# Altium PCB DISEÑO CON 3.3 Y 5 spi separado y diodos.PcbDoc
Units mm, origin at the board's own origin, x right, y up, seen from the top; angles counter-clockwise.
Board outline 76.2 x 63.5 mm, 2 copper layers (Top Layer, Bottom Layer); 31 components, 40 nets, 161 pads, 0 vias.
Unrouted connection lines stored in the file: 97.
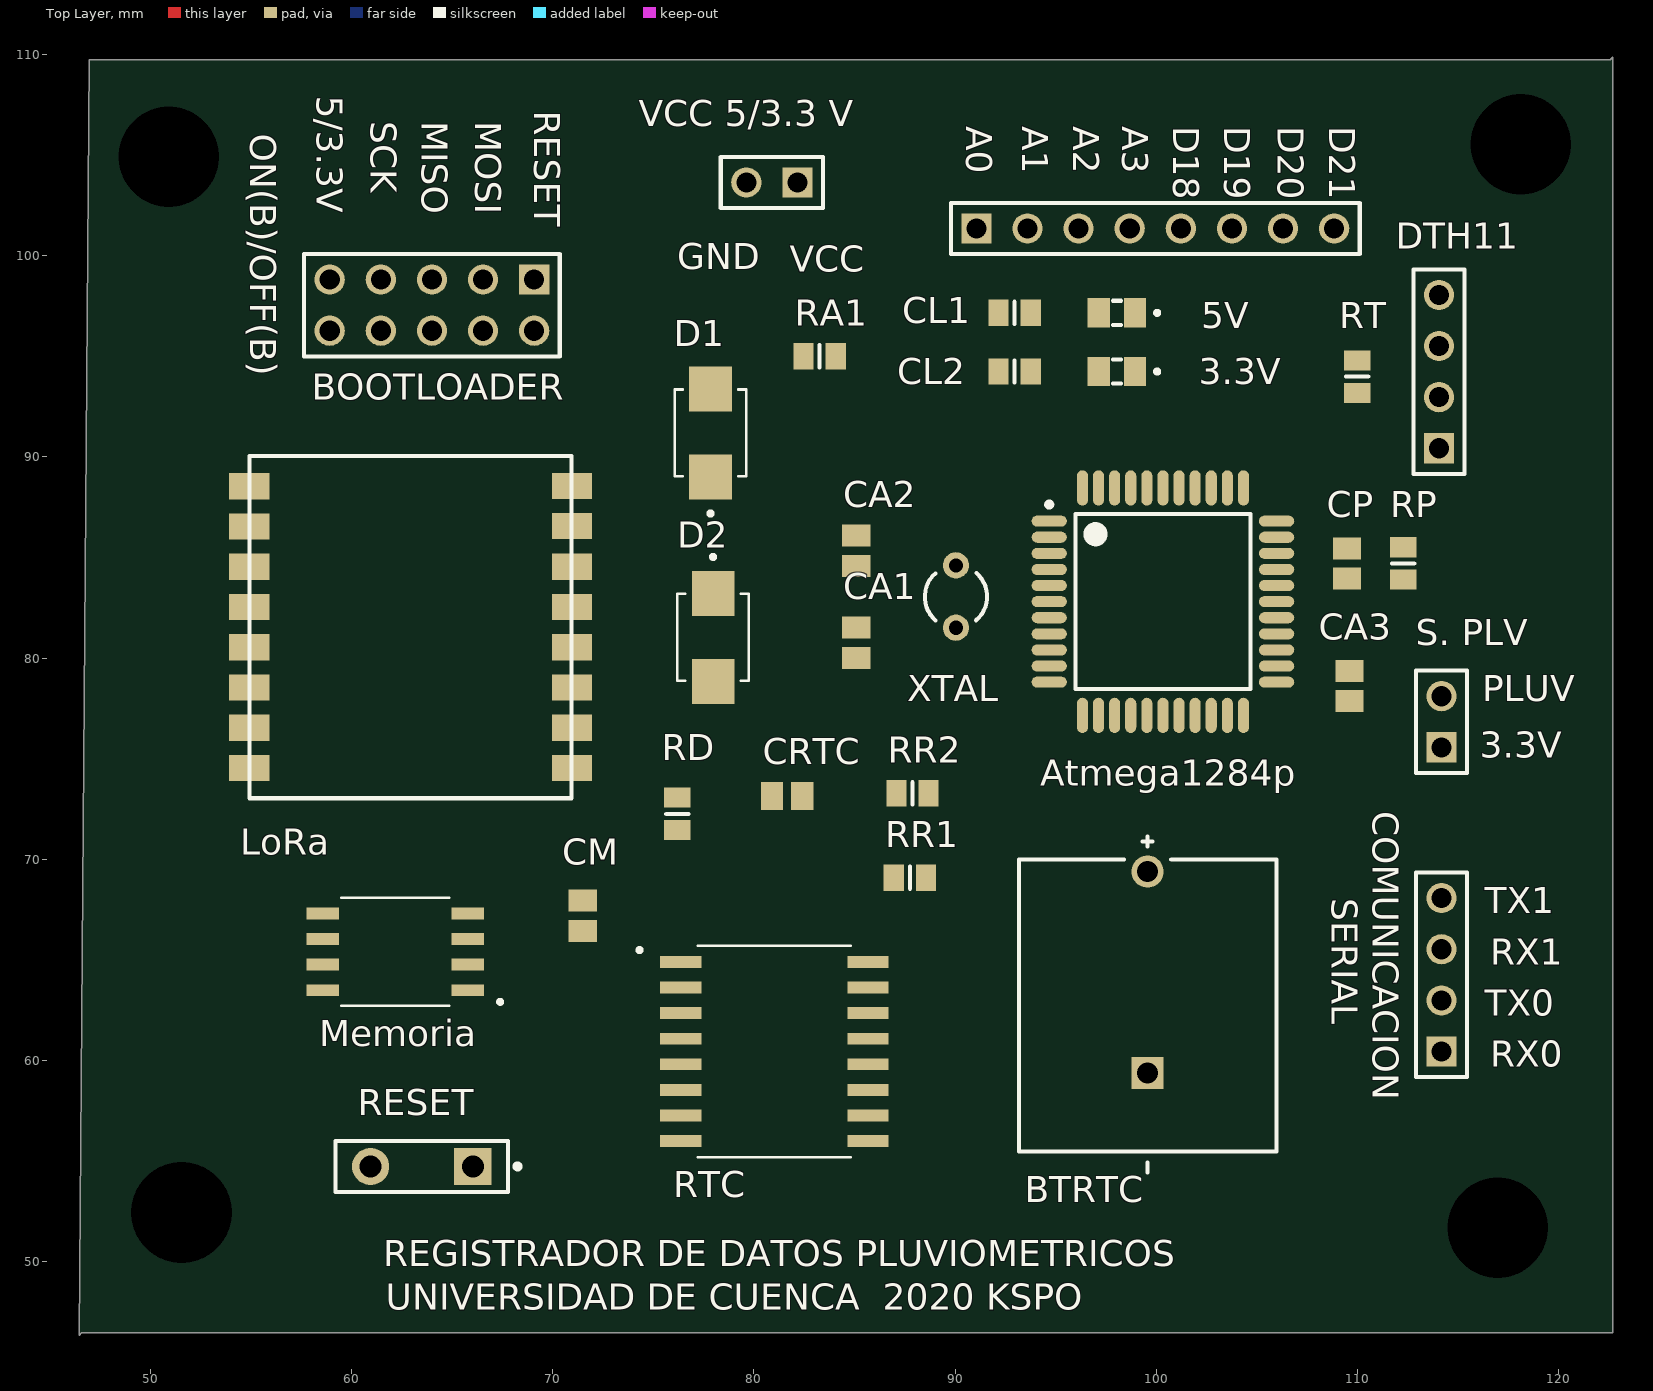
[diagram p0: Top Layer view]
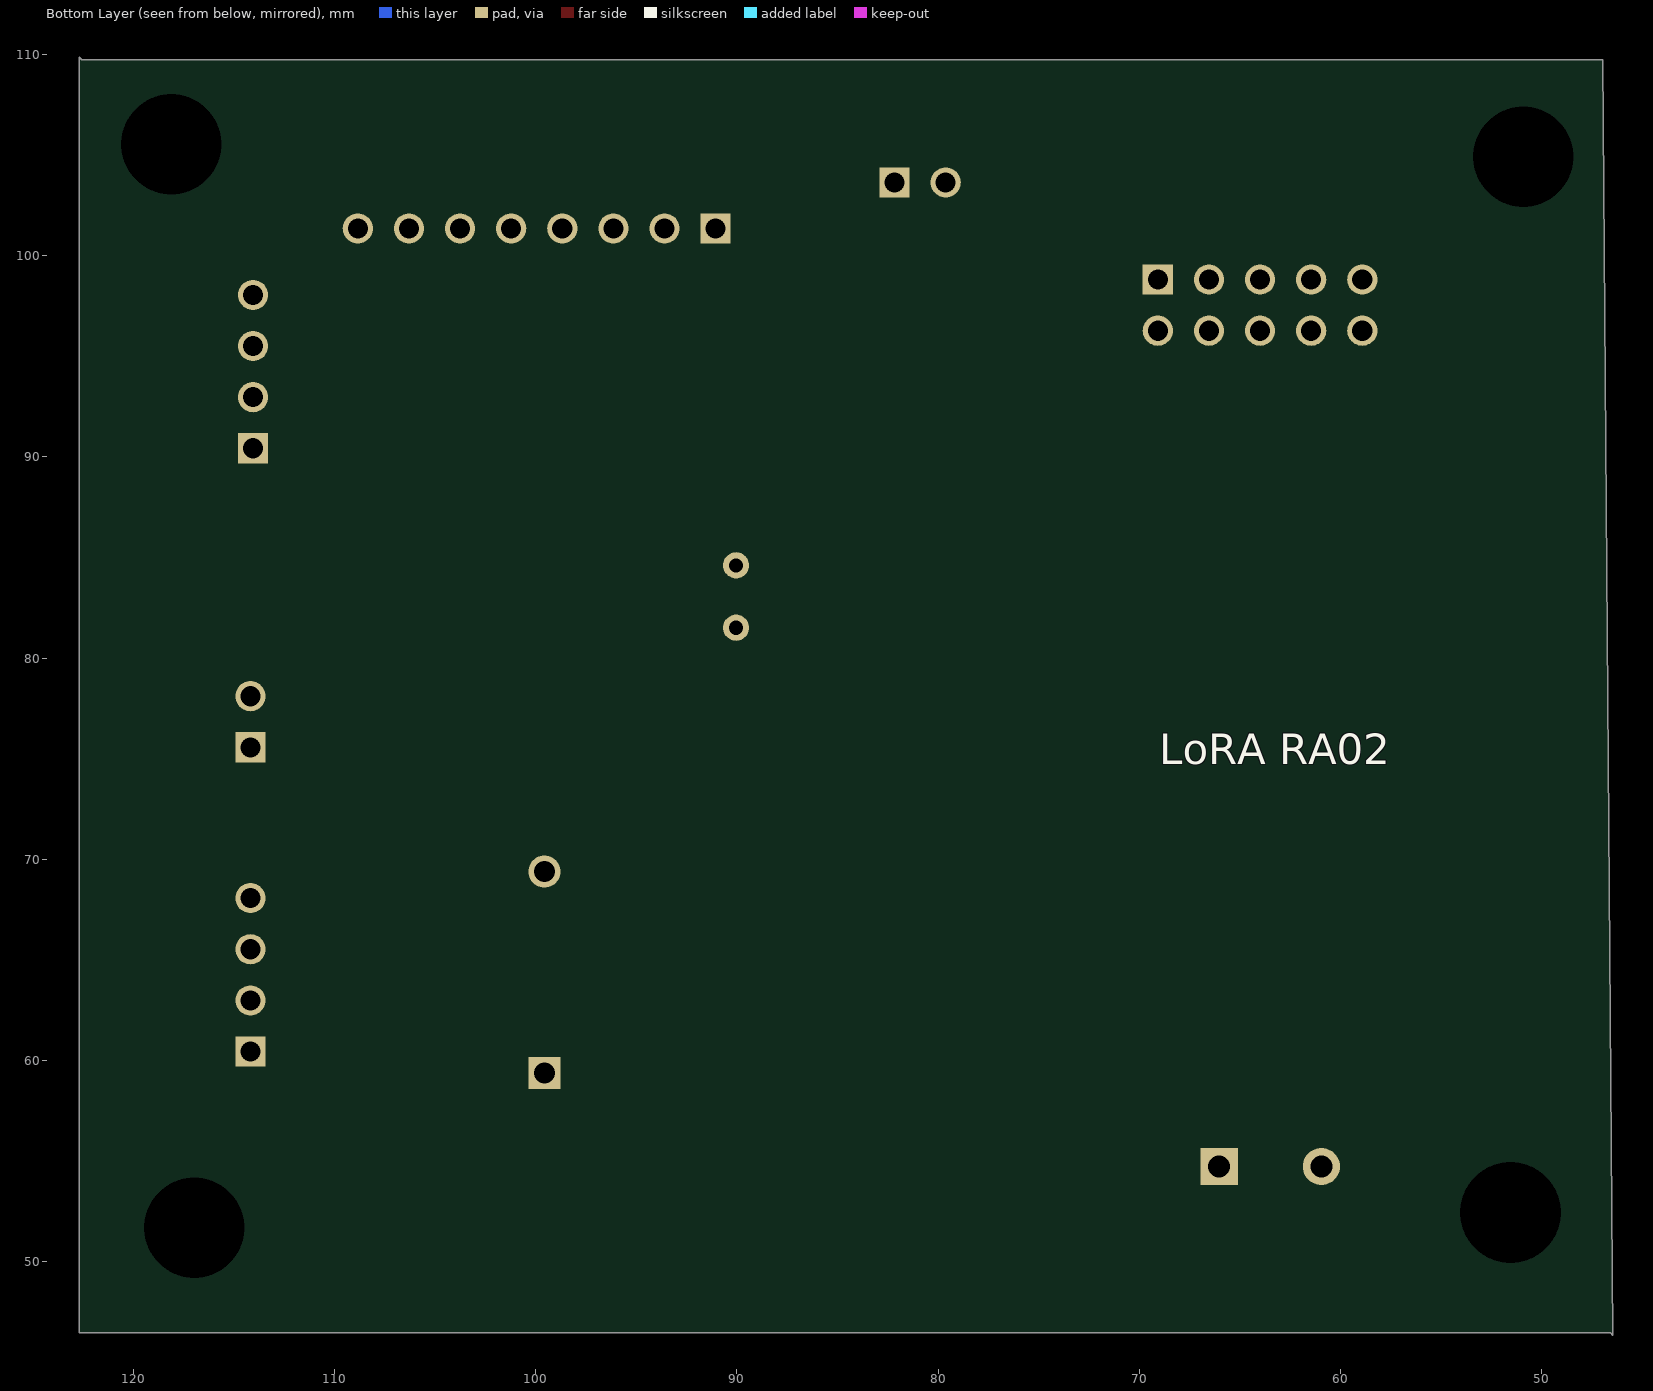
[diagram p1: Bottom Layer view, seen from below]

## Layer stack, top to bottom
Top Solder: solder mask 0.0102, Solder Resist, Dk 3.5
Top Layer: signal copper 0.0356
Dielectric 1: dielectric 0.32, FR-4, Dk 4.8
Bottom Layer: signal copper 0.0356
Bottom Solder: solder mask 0.0102, Solder Resist, Dk 3.5

## Board outline
46.99,109.728 122.555,109.728 122.682,109.855 122.682,46.482 46.609,46.482 46.482,46.355

## Design rules (kind name [scope] priority, off if disabled: settings)
Clearance [All] p1: gap=0.254 ignorepadtopadclearanceinfootprint=FALSE except(0: Arc-Hole Track-Hole SMDPad-Hole THPad-Hole Via-Hole Fill-Hole Poly-Hole Region-Hole Text-Hole)
PolygonConnect [All] p1: connectstyle=Relief reliefconductorwidth=0.254 reliefentries=4 polygonreliefangle="90 Angle" airgapwidth=0.254
RoutingVias [All] p1: holewidth=0.711 width=1.27 viastyle="Through Hole" minholewidth=0.711 minwidth=1.27 maxholewidth=0.711 maxwidth=1.27
SolderMaskExpansion [All] p1: expansion=0.102
Width [All] p1: maxlimit=0.254 minlimit=0.254 preferedwidth=0.254
30 further rules are at their usual default settings.

## Classes and differential pairs
component class "DISEÑO CON 3.3 Y 5 spi separado y diodos": BTRTC CA1 CA2 LORA Memoria RA1 RESET RTC

## Components (designator, comment, footprint, x,y, rotation, side; value= is the part's Value field where it differs from the comment)
1K "RLED5V" 6-0805_L 92.964,97.155 r0 top value=1K
Atmega1284p "ATmega1284-AUR" 44A_N 100.33,82.804 r0 top (schematic designator U1)
BOOTLOADER "Header 5X2" HDR2X5 69.088,98.806 r180 top (schematic designator "S/N BOOTLOADER")
BTRTC "CR-1220-HFN" Panasonic_CR-1220-HFN_MFG 99.568,62.738 r90 top
CA1 "Cap Semi" C0805 85.09,80.76 r270 top value=22pF
CA2 "Cap Semi" C0805 85.09,85.332 r90 top value=22pF
CA3 "Cap Semi" C0805 109.601,78.613 r270 top value=0.1uF (schematic designator CAtmega)
CM "Cap Semi" C0805 71.501,67.195 r270 top value=0.1uF (schematic designator CAM)
COMUNICACION "Header 4" HDR1X4 114.173,60.452 r90 top (schematic designator "COMUNICACION SERIAL")
CP "Cap Semi" C0805 109.474,84.697 r90 top value=0.1uF (schematic designator CPL)
CRTC "Cap Semi" C0805 81.661,73.152 r180 top value=0.1uF (schematic designator CRTC1)
D1 "Diode_Skty" *DIOM5436X247N 77.851,91.186 r90 top (schematic designator DSS24)
D2 "Diode_Skty" *DIOM5436X247N 77.978,81.026 r270 top (schematic designator DSSMe)
DTH11 "" HDR1X4 114.046,90.424 r90 top (schematic designator DTH)
LED3.3V "" *LEDC2012X70N_598-8140-107F(Primary) 98.044,94.234 r180 top
LED5V "" *LEDC2012X70N_598-8140-107F(Primary) 98.044,97.155 r180 top
LoRa "SX1278" SOP200P1800X250-16N 62.865,81.534 r0 top (schematic designator LORA)
Memoria "W25Q128JVSIM_TR" *SOIC127P790X216-8N 62.181,65.405 r180 top (schematic designator MEM)
"PIN A/D" "Header 8" HDR1X8 91.059,101.346 r0 top
PLUV "Header 2" HDR1X2 114.173,75.565 r90 top (schematic designator PLUVIOMETRO)
RA1 "Res3" 6-0805_L 83.274,94.996 r0 top value=10k
RAL3.3 "RLED3.3" 6-0805_L 92.964,94.234 r0 top value=1K
RD "Res3" 6-0805_L 76.2,72.263 r90 top value=10K (schematic designator RPLdio)
RESET "SW-PB" SPST-2 63.5,54.737 r180 top (schematic designator SW1)
RP "Res3" 6-0805_L 112.268,84.709 r90 top value=10K (schematic designator RPL)
RR1 "Res3" 6-0805_L 87.757,69.088 r0 top value=4.7K (schematic designator RTC1)
RR2 "Res3" 6-0805_L 87.884,73.279 r0 top value=4.7K (schematic designator RTC2)
RT "Res3" 6-0805_L 109.982,93.98 r90 top value=10K (schematic designator RDTH)
RTC "DS3231M+" *SOIC127P1032X265-16N 81.026,60.452 r0 top
"VCC 5/3.3 V" "Header 2" HDR1X2 82.169,103.632 r180 top (schematic designator "ALIMENTACION 5/3.3 V")
XTAL "XTAL" R38 90.043,83.058 r0 top (schematic designator YMega)

## Footprints (in the part's own frame and the unit in brackets; to place one, negate y for a bottom-side part, rotate by r counter-clockwise, add the part's x,y. Pads: shape width x height; smd on the part's side, far side on the other; paste and mask are expansions set on the pad)
6-0805_L [mm] "Chip Resistor, Body 2.0x1.2mm, IPC High Density"
  rect 1x1.3 smd: 1(-0.8,0) 2(0.8,0)
  silkscreen extent 0,-0.55 0,0.55, body extent -1.07,-0.7 1.07,0.7, height 0.7
44A_N [mm] "Thin QFP, 44-Leads, Body 10x10mm, Pitch 0.8mm, IPC Medium Density"
  oval 1.75x0.55 smd: 1(-5.65,4) 2(-5.65,3.2) 3(-5.65,2.4) 4(-5.65,1.6) 5(-5.65,0.8) 6(-5.65,0) 7(-5.65,-0.8) 8(-5.65,-1.6) 9(-5.65,-2.4) 10(-5.65,-3.2) 11(-5.65,-4) 23(5.65,-4) 24(5.65,-3.2) 25(5.65,-2.4) 26(5.65,-1.6) 27(5.65,-0.8) 28(5.65,0) 29(5.65,0.8) 30(5.65,1.6) 31(5.65,2.4) 32(5.65,3.2) 33(5.65,4)
  oval 0.55x1.75 smd: 12(-4,-5.65) 13(-3.2,-5.65) 14(-2.4,-5.65) 15(-1.6,-5.65) 16(-0.8,-5.65) 17(0,-5.65) 18(0.8,-5.65) 19(1.6,-5.65) 20(2.4,-5.65) 21(3.2,-5.65) 22(4,-5.65) 34(4,5.65) 35(3.2,5.65) 36(2.4,5.65) 37(1.6,5.65) 38(0.8,5.65) 39(0,5.65) 40(-0.8,5.65) 41(-1.6,5.65) 42(-2.4,5.65) 43(-3.2,5.65) 44(-4,5.65)
  silkscreen extent -5.77,-4.35 4.35,4.95, body extent -5,-5 5,5, height 1.2
*DIOM5436X247N [mm]
  rect 2.25x2.12 smd: A(2.185,0) C(-2.185,0)
  silkscreen extent -4.1,-1.78 2.16,1.78
*LEDC2012X70N_598-8140-107F(Primary) [mm]
  rect 1.1x1.45 smd: A(0.9,0) C(-0.9,0)
  silkscreen extent -2.1,-0.6 0.2,0.6
*SOIC127P790X216-8N [mm]
  rect 1.61x0.58 smd: 1(-3.605,1.905) 2(-3.605,0.635) 3(-3.605,-0.635) 4(-3.605,-1.905) 5(3.605,-1.905) 6(3.605,-0.635) 7(3.605,0.635) 8(3.605,1.905)
  silkscreen extent -5.32,-2.69 2.69,2.69
*SOIC127P1032X265-16N [mm]
  rect 2.05x0.59 smd: 1(-4.655,4.445) 2(-4.655,3.175) 3(-4.655,1.905) 4(-4.655,0.635) 5(-4.655,-0.635) 6(-4.655,-1.905) 7(-4.655,-3.175) 8(-4.655,-4.445) 9(4.655,-4.445) 10(4.655,-3.175) 11(4.655,-1.905) 12(4.655,-0.635) 13(4.655,0.635) 14(4.655,1.905) 15(4.655,3.175) 16(4.655,4.445)
  silkscreen extent -6.8,-5.25 3.8,5.25
C0805 [mm] "Chip Capacitor, Body 2.0x1.3mm, IPC High Density"
  rect 1.1x1.4 smd: 1(-0.75,0) 2(0.75,0)
  body extent -1.1,-0.72 1.1,0.72, height 1.4
HDR1X2 [mm] "Connector; Header; 2 Position"
  rect 1.5x1.5 hole 1: 1(0,0)
  round 1.5 hole 1: 2(2.54,0)
  silkscreen extent -1.27,-1.27 3.81,1.27
HDR1X4 [mm] "Connector; Header; 4 Position"
  rect 1.5x1.5 hole 1: 1(0,0)
  round 1.5 hole 1: 2(2.54,0) 3(5.08,0) 4(7.62,0)
  silkscreen extent -1.27,-1.27 8.89,1.27
HDR1X8 [mm] "Connector; Header; 8 Position"
  rect 1.5x1.5 hole 1: 1(0,0)
  round 1.5 hole 1: 2(2.54,0) 3(5.08,0) 4(7.62,0) 5(10.16,0) 6(12.7,0) 7(15.24,0) 8(17.78,0)
  silkscreen extent -1.27,-1.27 19.05,1.27
HDR2X5 [mm] "Connector; Header; 5x2 Position"
  rect 1.5x1.5 hole 1: 1(0,0)
  round 1.5 hole 1: 2(0,2.54) 3(2.54,0) 4(2.54,2.54) 5(5.08,0) 6(5.08,2.54) 7(7.62,0) 8(7.62,2.54) 9(10.16,0) 10(10.16,2.54)
  silkscreen extent -1.27,-1.27 11.43,3.81
Panasonic_CR-1220-HFN_MFG [mm]
  rect 1.6x1.6 hole 1.05 paste-1000 mask+0: 1(-3.35,0)
  round 1.6 hole 1.05 paste-1000 mask+0: 2(6.65,0)
  silkscreen extent -8.3,-6.4 8.4,6.4, body extent -7.35,-6.5 7.55,6.5, height 0.25
R38 [mm] "Crystal, Thru-Hole; 2 Leads; Body 3.1 x 8.2 mm (Dia.xH)"
  round 1.3 hole 0.7: 1(0,1.55) 2(0,-1.55)
  silkscreen extent -1.55,-1.19 1.55,1.17
SOP200P1800X250-16N [mm] "SOP, 16-Leads, Body 17,00x16,00mm, Pitch 2,00mm, IPC Medium Density"
  rect 2x1.3 smd: 1(-7.93,7) 2(-7.93,5) 3(-7.93,3) 5(-7.93,-1) 6(-7.93,-3) 7(-7.93,-5) 8(-7.93,-7) 9(8.1,-7) 10(8.1,-5) 11(8.1,-3) 12(8.1,-1) 13(8.1,1) 14(8.1,3) 15(8.1,5.029) 16(8.1,7.01)
  rect 2x1.3 smd mask+0.102: 4(-7.93,1)
  silkscreen extent -7.92,-8.5 8.08,8.5, body extent -8,-8.5 8,8.5, height 2.5
SPST-2 [mm] "Switch; 2 Leads"
  rect 1.85x1.85 hole 1.1: 1(-2.54,0)
  round 1.85 hole 1.1: 2(2.54,0)
  silkscreen extent -4.89,-1.27 4.28,1.27

## Part data
1K RAL3.3: library part Res3, "Resistor", LatestRevisionDate=29-May-2009, LatestRevisionNote="IPC-7351 Footprint Added.", PackageDescription="Chip Resistor", PackageReference=J1-0603, Published=8-Jun-2000, Publisher="Altium Limited"
Atmega1284p: "8-bit AVR Microcontroller, 128KB Flash, 4KB EEPROM, 16KB SRAM, 44-pin TQFP, Industrial Grade (-40°C to 85°C), Reel", Supplier Part Number 1=ATMEGA1284-AUR-ND, ComponentLink1Description="Manufacturer Link", ComponentLink1URL=http://www.atmel.com/products/avr/default.asp?, ComponentLink2Description="ATmega164A/164PA/324A/324PA/644A/644PA/1284/1284P Datasheet", ComponentLink2URL=http://www.atmel.com/dyn/resources/prod_documents/doc8272.pdf, ComponentLink3Description="ATmega164A/164PA/324A/324PA/644A/644PA/1284/1284P Summary", ComponentLink3URL=http://www.atmel.com/dyn/resources/prod_documents/8272S.pdf, ComponentLink4Description="Atmel.com Home", ComponentLink4URL=http://www.atmel.com, DatasheetVersion="revA, Jan-2010", PackageDescription="44-Pin Plastic Thin Profile Quad Flat Pack, 10 x 10 x 1.0 mm Body, 0.8 mm Pitch (TQFP)", PackageReference=44A, PackageVersion="rev.B, Oct-2001", Published=1-Apr-2010, Publisher="Altium Limited", Supplier 1=Digi-Key, Supplier 2=Mouser, Supplier Part Number 2=556-ATMEGA1284-AUR
BOOTLOADER: "Header, 5-Pin, Dual row", LatestRevisionDate=17-Jul-2002, LatestRevisionNote="Re-released for DXP Platform.", Publisher="Altium Limited"
CA1 CA2 CA3 CM CP CRTC: "Capacitor (Semiconductor SIM Model)", LatestRevisionDate=29-May-2009, LatestRevisionNote="IPC-7351 Footprint Added.", PackageDescription="Chip Capacitor", PackageReference=C1206, Published=8-Jun-2000, Publisher="Altium Limited"
COMUNICACION: "Header, 4-Pin", LatestRevisionDate=17-Jul-2002, LatestRevisionNote="Re-released for DXP Platform.", Publisher="Altium Limited"
D1 D2 LoRa: library part Component_1
DTH11: library part "Header 4", "Header, 4-Pin", LatestRevisionDate=17-Jul-2002, LatestRevisionNote="Re-released for DXP Platform.", Publisher="Altium Limited"
LED3.3V LED5V: library part 598-8140-107F, "Led; 0805 Smt Led, Yellow, Alingap, Water Clear Lens, 140 Deg Viewing Angle", Package="0805 Dialight", Availability=Unavailable, MF=Dialight, MP=598-8140-107F, Price=None, SnapEDA_Link=https://www.snapeda.com/parts/598-8140-107F/Dialight/view-part/?ref=snap
Memoria: "Ic Flash 128mbit 133mhz 8soic", Package="SOIC-8 Winbond", Availability=Unavailable, MF="Winbond Electronics", MP="W25Q128JVSIM TR", Price=None, SnapEDA_Link=https://www.snapeda.com/parts/W25Q128JVSIM%20TR/Winbond%20Electronics/view-part/?ref=snap
"PIN A/D": "Header, 8-Pin", LatestRevisionDate=17-Jul-2002, LatestRevisionNote="Re-released for DXP Platform.", Publisher="Altium Limited"
PLUV "VCC 5/3.3 V": "Header, 2-Pin", LatestRevisionDate=17-Jul-2002, LatestRevisionNote="Re-released for DXP Platform.", Publisher="Altium Limited"
RA1 RD RP RR1 RR2 RT: "Resistor", LatestRevisionDate=29-May-2009, LatestRevisionNote="IPC-7351 Footprint Added.", PackageDescription="Chip Resistor", PackageReference=J1-0603, Published=8-Jun-2000, Publisher="Altium Limited"
RESET: "Switch", LatestRevisionDate=17-Jul-2002, LatestRevisionNote="Re-released for DXP Platform.", PackageDescription="Switch; 2 Leads", PackageReference=SPST-2, Published=24-Mar-1999, Publisher="Altium Limited"
RTC: "Ic Real Time Clock I2c 16soic - Ds3231m+", Package="SOIC-16 Maxim", Availability=Unavailable, MF="Maxim Integrated", MP=DS3231M+, Price=None, SnapEDA_Link=https://www.snapeda.com/parts/DS3231M%2B/Maxim%20Integrated/view-part/?ref=snap
XTAL: "Crystal Oscillator", LatestRevisionDate=17-Jul-2002, LatestRevisionNote="Re-released for DXP Platform.", PackageDescription="Crystal, Thru-Hole; 2 Leads; Body 3.1 x 8.2 mm (Dia.xH)", PackageReference=R38, Published=8-Jun-2000, Publisher="Altium Limited"

## Free pads (board coordinates)
  round 1.524 hole 3.5: 6(31.478,-95.564)
  round 1.524 hole 5: 7(116.967,51.689) 8(118.11,105.537) 9(50.927,104.902) 10(51.562,52.451)

## Nets (pads, with @x,y where several pads share a name; then routed paths per layer and width w, separated by ;. In a path a pad name is that pad's centre, name@x,y a point inside that pad or via, vN(x,y) a via of type N, cw(c..) or ccw(c..) an arc to the next point about the centre after c; other vN are vias at no path point)
5V: 1K.1 "VCC 5/3.3 V.1" Atmega1284p.5 Atmega1284p.27 BOOTLOADER.9 CA3.2 RA1.1
D18: "PIN A/D.5" Atmega1284p.21
D19: "PIN A/D.6" Atmega1284p.22
D20: "PIN A/D.7" Atmega1284p.23
D21: "PIN A/D.8" Atmega1284p.24
DIO0: Atmega1284p.14 LoRa.5
DIO1: Atmega1284p.15 LoRa.6
DIO2: Atmega1284p.16 LoRa.7
DIO3: Atmega1284p.26 LoRa.8
DTH11: Atmega1284p.42 DTH11.2 RT.2
GND: "VCC 5/3.3 V.2" Atmega1284p.6 Atmega1284p.28 BTRTC.1 CA1.1 CA2.1 CA3.1 CM.1 CP.1 CRTC.2 DTH11.4 LED3.3V.C LED5V.C LoRa.16 Memoria.4 RD.1 RESET.1 RP.1 RTC.5 RTC.6 RTC.7 RTC.8 RTC.9 RTC.10 RTC.11 RTC.12 RTC.13
MISO: Atmega1284p.2 BOOTLOADER.5
MISO_COMP: BOOTLOADER.6 D1.C D2.C RD.2
MOSI: Atmega1284p.1 BOOTLOADER.3
MOSI_COMP: BOOTLOADER.4 LoRa.14 Memoria.5
MSS: Atmega1284p.13 Memoria.1
Net1K_2: 1K.2 LED5V.A
NetBTRTC_2: BTRTC.2 RTC.14
NetCA1_2: Atmega1284p.7 CA1.2 XTAL.2
NetCA2_2: Atmega1284p.8 CA2.2 XTAL.1
NetDSS24_A: D1.A LoRa.13
NetDSSMe_A: D2.A Memoria.2
NetLED3.3V_A: LED3.3V.A RAL3.3.2
NSS: Atmega1284p.44 LoRa.15
PA0: "PIN A/D.1" Atmega1284p.37
PA1: "PIN A/D.2" Atmega1284p.36
PA2: "PIN A/D.3" Atmega1284p.35
PA3: "PIN A/D.4" Atmega1284p.34
PA6_PLUV: Atmega1284p.31 CP.2 PLUV.2 RP.2
"RESET LORA": Atmega1284p.41 LoRa.4
RESET_A: Atmega1284p.4 BOOTLOADER.1 BOOTLOADER.2 RA1.2 RESET.2
RXD0: Atmega1284p.9 COMUNICACION.1
RXD1: Atmega1284p.11 COMUNICACION.3
SCK: Atmega1284p.3 BOOTLOADER.7
SCK_COMP: BOOTLOADER.8 LoRa.12 Memoria.6
SCL: Atmega1284p.19 RR1.2 RTC.16
SDA: Atmega1284p.20 RR2.2 RTC.15
TXD0: Atmega1284p.10 COMUNICACION.2
TXD1: Atmega1284p.12 COMUNICACION.4
VCC: Atmega1284p.33 BOOTLOADER.10 CM.2 CRTC.1 DTH11.1 LoRa.3 Memoria.3 Memoria.7 Memoria.8 PLUV.1 RAL3.3.1 RR1.1 RR2.1 RT.1 RTC.2
pads on no net: Atmega1284p.17 Atmega1284p.18 Atmega1284p.25 Atmega1284p.29 Atmega1284p.30 Atmega1284p.32 Atmega1284p.38 Atmega1284p.39 Atmega1284p.40 Atmega1284p.43 DTH11.3 LoRa.1 LoRa.2 LoRa.9 LoRa.10 LoRa.11 RTC.1 RTC.3 RTC.4

## Silkscreen, mask and mechanical layers (free items; w line width, h text height)
Top Overlay:
  text "5/3.3V" at 58.293,107.95 h1.3 r270
  text "RESET" at 69.088,107.188 h1.3 r270
  text "SCK" at 60.96,106.68 h1.3 r270
  text "MISO" at 63.5,106.68 h1.3 r270
  text "MOSI" at 66.167,106.68 h1.3 r270
  text "A0" at 90.551,106.426 h1.3 r270
  text "A1" at 93.345,106.426 h1.3 r270
  text "A2" at 95.885,106.426 h1.3 r270
  text "A3" at 98.298,106.426 h1.3 r270
  text "D18" at 100.838,106.426 h1.3 r270
  text "D19" at 103.378,106.426 h1.3 r270
  text "D20" at 106.045,106.426 h1.3 r270
  text "D21" at 108.585,106.426 h1.3 r270
  text "ON(B)/OFF(B)" at 54.991,106.045 h1.3 r270
  text "GND" at 76.2,99.314 h1.3
  text "VCC" at 81.788,99.187 h1.3
  text "CL1" at 87.376,96.647 h1.3
  text "5V" at 102.235,96.393 h1.3
  text "CL2" at 87.122,93.599 h1.3
  text "3.3V" at 102.108,93.599 h1.3
  text "S. PLV" at 112.903,80.645 h1.3
  text "3.3V" at 116.078,75.057 h1.3
  text "SERIAL" at 108.712,68.072 h1.3 r270
  text "TX1" at 116.332,67.31 h1.3
  text "RX1" at 116.586,64.77 h1.3
  text "TX0" at 116.332,62.23 h1.3
  text "RX0" at 116.586,59.69 h1.3
  text "REGISTRADOR DE DATOS PLUVIOMETRICOS" at 61.595,49.784 h1.3
  text "UNIVERSIDAD DE CUENCA  2020 KSPO" at 61.722,47.625 h1.3

## Text inside footprints (layer, text, board x,y; h text height)
LoRa: Bottom Overlay "LoRA RA02" at 69.012,74.727 h1.52